# Altium PCB FEE_PCB.PcbDoc (part 2 of 2)
Units mm, origin at the board's own origin, x right, y up, seen from the top; angles counter-clockwise.
Board outline 152.4 x 101.6 mm, 2 copper layers (Top Layer, Bottom Layer); 166 components, 108 nets, 486 pads, 10 vias.
Unrouted connection lines stored in the file: 130.
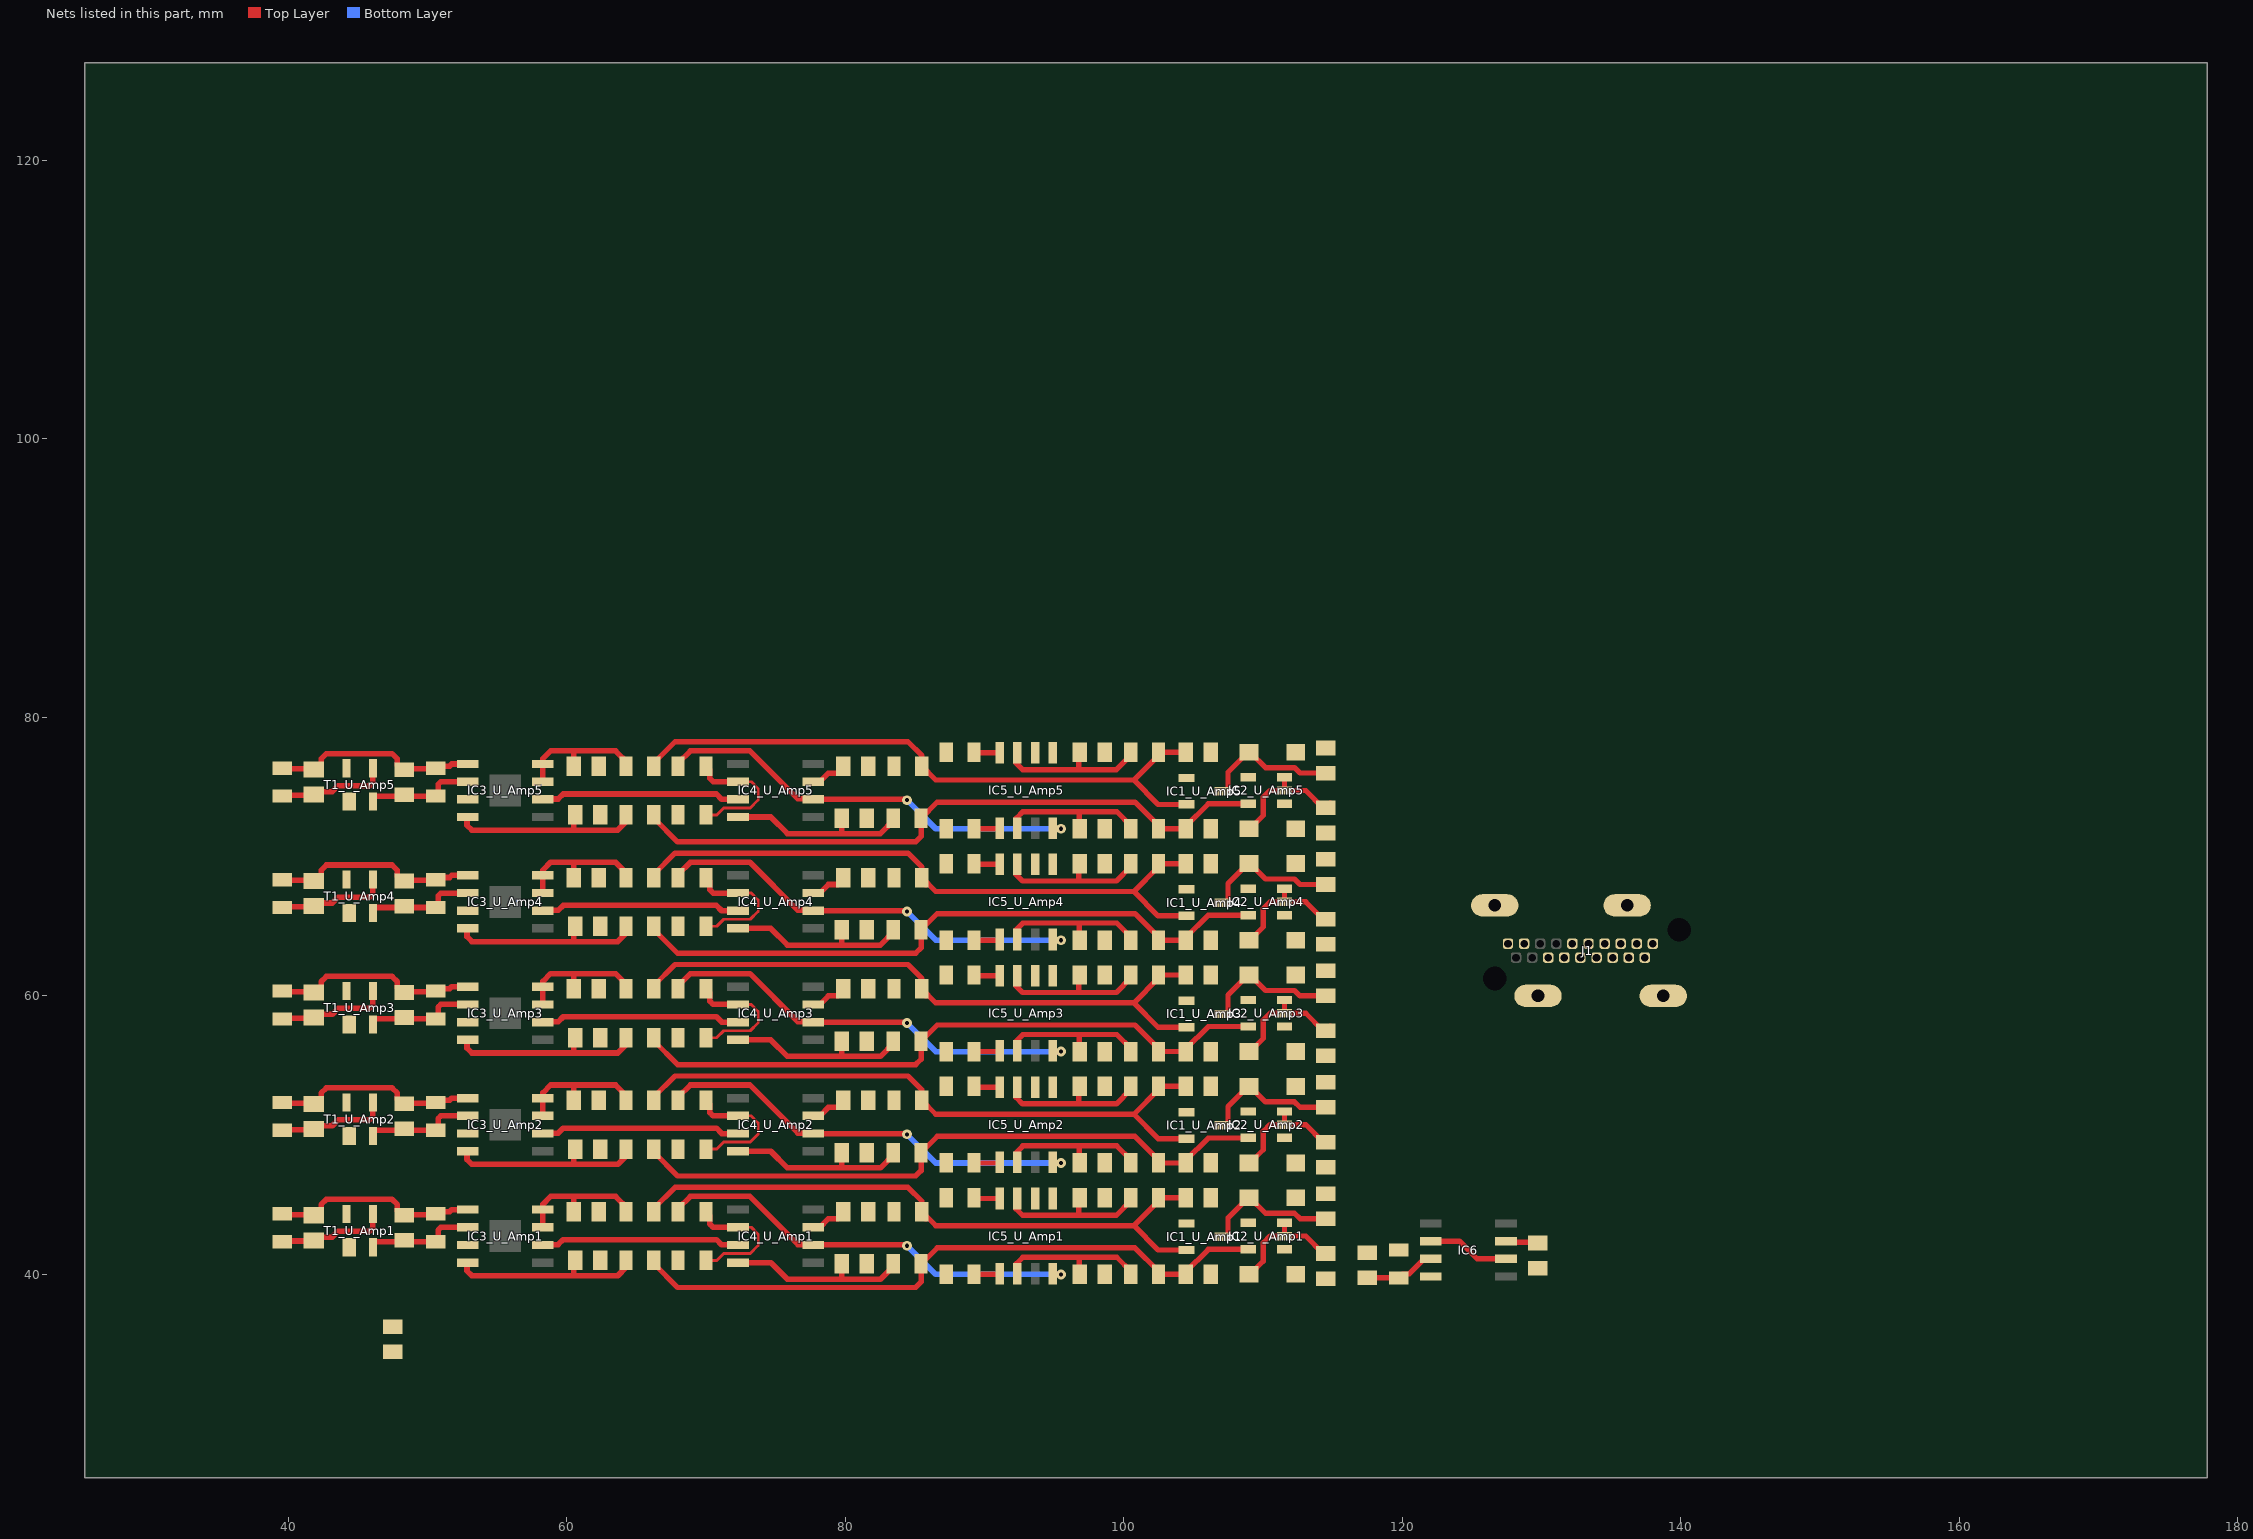
[diagram p2: the nets of this part, all layers, seen from the top]

## Part data
C2_U_Amp1 C2_U_Amp2 C2_U_Amp3 C2_U_Amp4 C2_U_Amp5 C4_U_Amp1 C4_U_Amp2 C4_U_Amp3 C4_U_Amp4 C4_U_Amp5 C8_U_Amp1 C8_U_Amp2 C8_U_Amp3 C8_U_Amp4 C8_U_Amp5 C10_U_Amp1 C10_U_Amp2 C10_U_Amp3 C10_U_Amp4 C10_U_Amp5 C11_U_Amp1 C11_U_Amp2 C11_U_Amp3 C11_U_Amp4 C11_U_Amp5 C12_U_Amp1 C12_U_Amp2 C12_U_Amp3 C12_U_Amp4 C12_U_Amp5 C13_U_Amp1 C13_U_Amp2 C13_U_Amp3 C13_U_Amp4 C13_U_Amp5 C14_U_Amp1 C14_U_Amp2 C14_U_Amp3 C14_U_Amp4 C14_U_Amp5 C15_U_Amp1 C15_U_Amp2 C15_U_Amp3 C15_U_Amp4 C15_U_Amp5 C16_U_Amp1 C16_U_Amp2 C16_U_Amp3 C16_U_Amp4 C16_U_Amp5 C17 C18 C19: library part CC0805_100NF_50V_10%_X7R, "Non-polarised capacitor", Case=0805, Manufacturer=GENERIC, Manufacturer1 ComponentHeight=1mm, Manufacturer1 Example=TDK, Manufacturer1 Part Number=C2012X7R1H104K085AA, Tolerance=±10%, Voltage=50V, Author="CERN DEM JLC", Component Type=Standard, CreateDate=03.12.2007, HelpURL=\\cern.ch\dfs\Applications\Altium\Datasheets\CC0805_X7R_TDK_C.pdf, LatestRevisionDate=22.04.2015, Manufacturer Part Number=CC0805_100NF_50V_10%_X7R, Mounted=Yes, Part Description="SMD Multilayer Chip Ceramic Capacitor", Part Number=CC0805_100NF_50V_10%_X7R, Pin Count=2, Sense=No, SMD=Yes, Socket=No, Status=Preferred, TC=X7R
C5_U_Amp1 C5_U_Amp2 C5_U_Amp3 C5_U_Amp4 C5_U_Amp5: library part CC0805_100PF_50V_5%_C0G_KEMET_C0805C101J5GACAUTO, "Non-polarised capacitor", Case=0805, Manufacturer=KEMET, Manufacturer Part Number=C0805C101J5GACAUTO, Tolerance=±5%, Voltage=50V, Author="CERN DEM BC", Component Type=Standard, ComponentHeight=0.88mm, CreateDate=26.02.2016, HelpURL=\\cern.ch\dfs\Applications\Altium\Datasheets\CC0805_KEMET_C0805C101J5GACAUTO.pdf, LatestRevisionDate=26.02.2016, Mounted=Yes, Part Description="SMD Multilayer Chip Ceramic Capacitor (Automotive Grade)", Part Number=CC0805_100PF_50V_5%_C0G_KEMET_C0805C101J5GACAUTO, Pin Count=2, Sense=No, SMD=Yes, Socket=No, Status="Not Recommended", TC=C0G/NP0
C6_U_Amp1 C6_U_Amp2 C6_U_Amp3 C6_U_Amp4 C6_U_Amp5: library part CC0805_10PF_50V_1%_NP0, "Non-polarised capacitor", Case=0805, Manufacturer=GENERIC, Manufacturer1 ComponentHeight=1.35mm, Manufacturer1 Example=PHYCOMP, Manufacturer1 Part Number=223886118109, Tolerance=±1%, Voltage=50V, Author="CERN DEM MR", Component Type=Standard, CreateDate=31.05.2016, HelpURL=\\cern.ch\dfs\Applications\Altium\Datasheets\CC0805_NP0_PHYCOMP.pdf, LatestRevisionDate=31.05.2016, Manufacturer Part Number=CC0805_10PF_50V_1%_NP0, Mounted=Yes, Part Description="SMD Multilayer Chip Ceramic Capacitor", Part Number=CC0805_10PF_50V_1%_NP0, Pin Count=2, Sense=No, SMD=Yes, Socket=No, Status=None, TC=C0G/NP0
IC1_U_Amp1 IC1_U_Amp2 IC1_U_Amp3 IC1_U_Amp4 IC1_U_Amp5: "3-Terminal Regulator 1=GND 2=OUT 3=IN", Case=SOT23-3, Manufacturer="MICROCHIP TECHNOLOGY", Author="CERN DEM JLC", Bonding=No, Component Type=Standard, ComponentHeight=1.45mm, CreateDate=16.02.2017, Device=MCP1702T-5002E/CB, HelpURL=\\cern.ch\dfs\Applications\Altium\Datasheets\MCP1702T-5002E-CB.pdf, LatestRevisionDate=16.02.2017, Manufacturer Part Number=MCP1702T-5002E/CB, Mounted=Yes, PackageDescription="SOT, 0.95mm Pitch; 3 Pin, 1.50mm W X 2.90mm L X 1.45mm H Body, IPC Medium Density", Part Description="5V 250mA Low Quiescent Current LDO Positive Voltage Regulator", Part Number=MCP1702T-5002E/CB, Pin Count=3, PressFit=No, Sense=No, SMD=Yes, Socket=No
IC2_U_Amp1 IC2_U_Amp2 IC2_U_Amp3 IC2_U_Amp4 IC2_U_Amp5: "200mA, Negative-Output, Low-Dropout Linear Regulator", Case=SOT23-5, Manufacturer=MAXIM, Author="CERN DEM JLC", Bonding=No, Component Type=Standard, ComponentHeight=1.45mm, CreateDate=17.02.2010, Device=MAX1735EUK50+T, HelpURL=\\cern.ch\dfs\Applications\Altium\Datasheets\MAX1735EUK50+T.pdf, LatestRevisionDate=17.02.2010, Manufacturer Part Number=MAX1735EUK50+T, Mounted=Yes, PackageDescription="SOT, 0.95mm pitch; 5 pin, 1.60mm W X 2.90mm L X 1.45mm H body, IPC Medium Density", Part Description="5V, 200mA, Negative-Output, Low-Dropout Linear Regulator", Part Number=MAX1735EUK50+T, Pin Count=5, PressFit=No, Sense=No, SMD=Yes, Socket=No
IC3_U_Amp1 IC3_U_Amp2 IC3_U_Amp3 IC3_U_Amp4 IC3_U_Amp5: library part ADA4817-1, Manufacturer=AD, Name=ADA4817-1
IC4_U_Amp1 IC4_U_Amp2 IC4_U_Amp3 IC4_U_Amp4 IC4_U_Amp5: library part AD8055ANZ, Case=DIP8-300, Manufacturer="ANALOG DEVICES", Author="CERN DEM JLC", Bonding=No, Component Type=Standard, ComponentHeight=5.33mm, CreateDate=14.03.2011, Device=AD8055ANZ, HelpURL=\\cern.ch\dfs\Applications\Altium\Datasheets\AD8055ANZ.pdf, LatestRevisionDate=14.03.2011, Manufacturer Part Number=AD8055ANZ, Mounted=Yes, PackageDescription="DIP 8 Leads, Row Spacing 7.62 mm; Pitch 2.54 mm", Part Description="Low Cost, 300 MHz Voltage Feedback Amplifier", Part Number=AD8055ANZ, Pin Count=7, PressFit=No, Sense=No, SMD=No, Socket=Yes
IC5_U_Amp1 IC5_U_Amp2 IC5_U_Amp3 IC5_U_Amp4 IC5_U_Amp5: "Differential Amplifier", Case=SOIC8, Manufacturer="ANALOG DEVICES", Author="CERN DEM JMW", Bonding=No, Component Type=Standard, ComponentHeight=1.75mm, CreateDate=23.09.2008, Device=AD8131AR, HelpURL=\\cern.ch\dfs\Applications\Altium\Datasheets\AD8131AR.pdf, LatestRevisionDate=13.04.2010, Manufacturer Part Number=AD8131AR, Mounted=Yes, PackageDescription="SOIC 8, Pitch 1.27mm - Body 4x5mm, IPC Medium Density", Part Description="Lost Cost, High Speed Differential Driver", Part Number=AD8131AR, Pin Count=7, PressFit=No, Sense=No, SMD=Yes, Socket=No, Status="Not recommended"
IC6: "Operational Amplifier", Case=SOIC8, Manufacturer="ANALOG DEVICES", Author="CERN DEM JLC", Bonding=No, Component Type=Standard, ComponentHeight=1.75mm, CreateDate=12.06.2013, Device=AD8531ARZ, HelpURL=\\cern.ch\dfs\Applications\Altium\Datasheets\AD8531ARZ.pdf, LatestRevisionDate=12.06.2013, Manufacturer Part Number=AD8531ARZ, Mounted=Yes, PackageDescription="SOIC 8, Pitch 1.27mm - Body 4x5mm, IPC Medium Density", Part Description="Low Cost, 250 mA Output, Single-Supply Amplifier", Part Number=AD8531ARZ, Pin Count=8, PressFit=No, Sense=No, SMD=Yes, Socket=No
J1: library part TYCO_2007435-1, "Connector HDMI 19 Male + 1 Shield", Manufacturer="TYCO ELECTRONICS", Manufacturer Part Number=2007435-1, Author="CERN DEM MR", Component Type=Standard, ComponentHeight=16.4mm, CreateDate=05.07.2016, Family=HDMI, HelpURL=\\cern.ch\dfs\Applications\Altium\Datasheets\TYCO_2007435-1.pdf, LatestRevisionDate=05.07.2016, Mounted=Yes, Part Description="0.578mm Pitch, Through-Hole Right Angle 19 Contacts Flag-HDMI Type-A Receptacle Thru Hole Mounting Pads", Part Number=TYCO_2007435-1, Pin Count=23, PressFit=No, Sense=No, SMD=No, Socket=No, Status=None
L1_U_Amp1 L1_U_Amp2 L1_U_Amp3 L1_U_Amp4 L1_U_Amp5 L2_U_Amp1 L2_U_Amp2 L2_U_Amp3 L2_U_Amp4 L2_U_Amp5: library part IND1206_MURATA_BLM31PG500SN1, "Inductor", Case=1206, Manufacturer=MURATA, Manufacturer Part Number=BLM31PG500SN1, Power=3.5A, Resistance=0.015R, Author="CERN DEM JLC", Component Type=Standard, ComponentHeight=1.3mm, CreateDate=05.12.2013, HelpURL=\\cern.ch\dfs\Applications\Altium\Datasheets\IND1206_MURATA_BLM31P.pdf, LatestRevisionDate=05.12.2013, Mounted=Yes, Part Description="SMD EMIFIL Chip Ferrite Bead", Part Number=IND1206_MURATA_BLM31PG500SN1, Pin Count=2, Sense=No, SMD=Yes, Socket=No, Status=None
R1_U_Amp1 R1_U_Amp2 R1_U_Amp3 R1_U_Amp4 R1_U_Amp5 R4_U_Amp1 R4_U_Amp2 R4_U_Amp3 R4_U_Amp4 R4_U_Amp5: library part R0805_5K1_1%_0.125W_100PPM, "Resistor - 1%", Case=0805, Manufacturer=GENERIC, Manufacturer1 ComponentHeight=0.6mm, Manufacturer1 Example="NIC COMPONENT", Manufacturer1 Part Number=NRC10F5101TRF, Power=0.125W, Tolerance=±1%, Author="CERN DEM JLC", Component Type=Standard, CreateDate=03.12.2007, HelpURL=\\cern.ch\dfs\Applications\Altium\Datasheets\R0805_NIC_NRC.pdf, LatestRevisionDate=13.03.2008, Manufacturer Part Number=R0805_5K1_1%_0.125W_100PPM, Mounted=Yes, Part Description="General Purpose Thick Film Chip Resistor", Part Number=R0805_5K1_1%_0.125W_100PPM, Pin Count=2, PressFit=No, Sense=No, SMD=Yes, Socket=No, Status=Preferred, TC=±100ppm/°C
R2_U_Amp1 R2_U_Amp2 R2_U_Amp3 R2_U_Amp4 R2_U_Amp5 R3_U_Amp1 R3_U_Amp2 R3_U_Amp3 R3_U_Amp4 R3_U_Amp5 R5_U_Amp1 R5_U_Amp2 R5_U_Amp3 R5_U_Amp4 R5_U_Amp5 R7_U_Amp1 R7_U_Amp2 R7_U_Amp3 R7_U_Amp4 R7_U_Amp5 R8_U_Amp1 R8_U_Amp2 R8_U_Amp3 R8_U_Amp4 R8_U_Amp5 R9_U_Amp1 R9_U_Amp2 R9_U_Amp3 R9_U_Amp4 R9_U_Amp5: library part R0805_3R_1%_0.125W_200PPM, "Resistor - 1%", Case=0805, Manufacturer=GENERIC, Manufacturer1 ComponentHeight=0.65mm, Manufacturer1 Example="YAGEO PHYCOMP", Manufacturer1 Part Number="232273463008L or RC0805FR-073RL", Power=0.125W, Tolerance=±1%, Author="CERN DEM JLC", Component Type=Standard, CreateDate=03.12.2007, HelpURL=\\cern.ch\dfs\Applications\Altium\Datasheets\R0805_Phycomp_RC0805.pdf, LatestRevisionDate=17.10.2012, Manufacturer Part Number=R0805_3R_1%_0.125W_200PPM, Mounted=Yes, Part Description="General Purpose Thick Film Chip Resistor", Part Number=R0805_3R_1%_0.125W_200PPM, Pin Count=2, PressFit=No, Sense=No, SMD=Yes, Socket=No, Status=Preferred, TC=±200ppm/°C
R6_U_Amp1 R6_U_Amp2 R6_U_Amp3 R6_U_Amp4 R6_U_Amp5: library part R0805_43K_1%_0.125W_100PPM, "Resistor - 1%", Case=0805, Manufacturer=GENERIC, Manufacturer1 ComponentHeight=0.6mm, Manufacturer1 Example="NIC COMPONENT", Manufacturer1 Part Number=NRC10F4302TRF, Power=0.125W, Tolerance=±1%, Author="CERN DEM JLC", Component Type=Standard, CreateDate=03.12.2007, HelpURL=\\cern.ch\dfs\Applications\Altium\Datasheets\R0805_NIC_NRC.pdf, LatestRevisionDate=13.03.2008, Manufacturer Part Number=R0805_43K_1%_0.125W_100PPM, Mounted=Yes, Part Description="General Purpose Thick Film Chip Resistor", Part Number=R0805_43K_1%_0.125W_100PPM, Pin Count=2, PressFit=No, Sense=No, SMD=Yes, Socket=No, Status=Preferred, TC=±100ppm/°C
R10_U_Amp1 R10_U_Amp2 R10_U_Amp3 R10_U_Amp4 R10_U_Amp5 R11_U_Amp1 R11_U_Amp2 R11_U_Amp3 R11_U_Amp4 R11_U_Amp5: library part R0805_51R_1%_0.125W_100PPM, "Resistor - 1%", Case=0805, Manufacturer=GENERIC, Manufacturer1 ComponentHeight=0.6mm, Manufacturer1 Example="NIC COMPONENT", Manufacturer1 Part Number=NRC10F51R0TRF, Power=0.125W, Tolerance=±1%, Author="CERN DEM JLC", Component Type=Standard, CreateDate=03.12.2007, HelpURL=\\cern.ch\dfs\Applications\Altium\Datasheets\R0805_NIC_NRC.pdf, LatestRevisionDate=13.03.2008, Manufacturer Part Number=R0805_51R_1%_0.125W_100PPM, Mounted=Yes, Part Description="General Purpose Thick Film Chip Resistor", Part Number=R0805_51R_1%_0.125W_100PPM, Pin Count=2, PressFit=No, Sense=No, SMD=Yes, Socket=No, Status=Preferred, TC=±100ppm/°C
R12: library part R0805_1K_1%_0.125W_100PPM, "Resistor - 1%", Case=0805, Manufacturer=GENERIC, Manufacturer1 ComponentHeight=0.6mm, Manufacturer1 Example="NIC COMPONENT", Manufacturer1 Part Number=NRC10F1001TRF, Power=0.125W, Tolerance=±1%, Author="CERN DEM JLC", Component Type=Standard, CreateDate=03.12.2007, HelpURL=\\cern.ch\dfs\Applications\Altium\Datasheets\R0805_NIC_NRC.pdf, LatestRevisionDate=13.03.2008, Manufacturer Part Number=R0805_1K_1%_0.125W_100PPM, Mounted=Yes, Part Description="General Purpose Thick Film Chip Resistor", Part Number=R0805_1K_1%_0.125W_100PPM, Pin Count=2, PressFit=No, Sense=No, SMD=Yes, Socket=No, Status=Preferred, TC=±100ppm/°C
R13_U_Amp1 R13_U_Amp2 R13_U_Amp3 R13_U_Amp4 R13_U_Amp5: library part R0805_510R_1%_0.125W_100PPM, "Resistor - 1%", Case=0805, Manufacturer=GENERIC, Manufacturer1 ComponentHeight=0.6mm, Manufacturer1 Example="NIC COMPONENT", Manufacturer1 Part Number=NRC10F5100TRF, Power=0.125W, Tolerance=±1%, Author="CERN DEM JLC", Component Type=Standard, CreateDate=03.12.2007, HelpURL=\\cern.ch\dfs\Applications\Altium\Datasheets\R0805_NIC_NRC.pdf, LatestRevisionDate=13.03.2008, Manufacturer Part Number=R0805_510R_1%_0.125W_100PPM, Mounted=Yes, Part Description="General Purpose Thick Film Chip Resistor", Part Number=R0805_510R_1%_0.125W_100PPM, Pin Count=2, PressFit=No, Sense=No, SMD=Yes, Socket=No, Status=Preferred, TC=±100ppm/°C
T1_U_Amp1 T1_U_Amp2 T1_U_Amp3 T1_U_Amp4 T1_U_Amp5: "N-CHANNEL DMOS FET WITH ZENER DIODE", Case=SOT143N, Manufacturer=CALOGIC, Author="CERN DEM MR", Bonding=No, Component Type=Standard, ComponentHeight=1.3mm, CreateDate=19.05.2016, Device=SST213, HelpURL=\\cern.ch\dfs\Applications\Altium\Datasheets\SST213.pdf, LatestRevisionDate=19.05.2016, Manufacturer Part Number=SST213, Mounted=Yes, PackageDescription="SOT143, 4-Leads, Body 3.0x2.6mm (max), Pitch 1.92mm, IPC Medium Density", Part Description="Fast DMOS FET Switches N-Channel Enhancement-Mode", Part Number=SST213, Pin Count=4, PressFit=No, Sense=No, SMD=Yes, Socket=No

## Via types
v1: diameter 0.7, hole 0.3, Top Layer to Bottom Layer, 10 vias

## Nets (pads, with @x,y where several pads share a name; then routed paths per layer and width w, separated by ;. In a path a pad name is that pad's centre, name@x,y a point inside that pad or via, vN(x,y) a via of type N, cw(c..) or ccw(c..) an arc to the next point about the centre after c; other vN are vias at no path point)
CHASSIS: J1.2 J1.5 J1.8 J1.11 J1.17 J1.SHIELD
DET_IN0: C6_U_Amp5.1 IC3_U_Amp5.2 R1_U_Amp5.1 T1_U_Amp5.2 | length 8
  Top Layer w0.4: T1_U_Amp5.2@46.085,73.947 46.085,74.247 46.185,74.347 48.335,74.347 50.731,74.347 50.768,74.385 50.768,75.188 50.965,75.385 IC3_U_Amp5.2@52.888,75.385
DET_IN1: C6_U_Amp4.1 IC3_U_Amp4.2 R1_U_Amp4.1 T1_U_Amp4.2 | length 8
  Top Layer w0.4: T1_U_Amp4.2@46.085,65.947 46.085,66.247 46.185,66.347 48.335,66.347 50.731,66.347 50.768,66.385 50.768,67.188 50.965,67.385 IC3_U_Amp4.2@52.888,67.385
DET_IN2: C6_U_Amp3.1 IC3_U_Amp3.2 R1_U_Amp3.1 T1_U_Amp3.2 | length 8
  Top Layer w0.4: T1_U_Amp3.2@46.085,57.947 46.085,58.247 46.185,58.347 48.335,58.347 50.731,58.347 50.768,58.385 50.768,59.188 50.965,59.385 IC3_U_Amp3.2@52.888,59.385
DET_IN3: C6_U_Amp2.1 IC3_U_Amp2.2 R1_U_Amp2.1 T1_U_Amp2.2 | length 8
  Top Layer w0.4: T1_U_Amp2.2@46.085,49.947 46.085,50.247 46.185,50.347 48.335,50.347 50.731,50.347 50.768,50.385 50.768,51.188 50.965,51.385 IC3_U_Amp2.2@52.888,51.385
DET_IN4: C6_U_Amp1.1 IC3_U_Amp1.2 R1_U_Amp1.1 T1_U_Amp1.2 | length 8
  Top Layer w0.4: T1_U_Amp1.2@46.085,41.947 46.085,42.247 46.185,42.347 48.335,42.347 50.731,42.347 50.768,42.385 50.768,43.188 50.965,43.385 IC3_U_Amp1.2@52.888,43.385
GND: C2_U_Amp1.2 C2_U_Amp2.2 C2_U_Amp3.2 C2_U_Amp4.2 C2_U_Amp5.2 C4_U_Amp1.2 C4_U_Amp2.2 C4_U_Amp3.2 C4_U_Amp4.2 C4_U_Amp5.2 C8_U_Amp1.2 C8_U_Amp2.2 C8_U_Amp3.2 C8_U_Amp4.2 C8_U_Amp5.2 C10_U_Amp1.2 C10_U_Amp2.2 C10_U_Amp3.2 C10_U_Amp4.2 C10_U_Amp5.2 C11_U_Amp1.2 C11_U_Amp2.2 C11_U_Amp3.2 C11_U_Amp4.2 C11_U_Amp5.2 C12_U_Amp1.2 C12_U_Amp2.2 C12_U_Amp3.2 C12_U_Amp4.2 C12_U_Amp5.2 C13_U_Amp1.2 C13_U_Amp2.2 C13_U_Amp3.2 C13_U_Amp4.2 C13_U_Amp5.2 C14_U_Amp1.2 C14_U_Amp2.2 C14_U_Amp3.2 C14_U_Amp4.2 C14_U_Amp5.2 C15_U_Amp1.2 C15_U_Amp2.2 C15_U_Amp3.2 C15_U_Amp4.2 C15_U_Amp5.2 C16_U_Amp1.2 C16_U_Amp2.2 C16_U_Amp3.2 C16_U_Amp4.2 C16_U_Amp5.2 C17.1 C18.2 C19.1 IC1_U_Amp1.1 IC1_U_Amp2.1 IC1_U_Amp3.1 IC1_U_Amp4.1 IC1_U_Amp5.1 IC2_U_Amp1.1 IC2_U_Amp1.4 IC2_U_Amp2.1 IC2_U_Amp2.4 IC2_U_Amp3.1 IC2_U_Amp3.4 IC2_U_Amp4.1 IC2_U_Amp4.4 IC2_U_Amp5.1 IC2_U_Amp5.4 IC3_U_Amp1.3 IC3_U_Amp2.3 IC3_U_Amp3.3 IC3_U_Amp4.3 IC3_U_Amp5.3 IC5_U_Amp1.2 IC5_U_Amp2.2 IC5_U_Amp3.2 IC5_U_Amp4.2 IC5_U_Amp5.2 IC6.4 R4_U_Amp1.1 R4_U_Amp2.1 R4_U_Amp3.1 R4_U_Amp4.1 R4_U_Amp5.1 T1_U_Amp1.1 T1_U_Amp2.1 T1_U_Amp3.1 T1_U_Amp4.1 T1_U_Amp5.1
NetC2_U_Amp1_1: C2_U_Amp1.1 IC1_U_Amp1.3 L1_U_Amp1.2 | length 9.9
  Top Layer w0.381: IC1_U_Amp1.3@107.1,42.7 107.375,42.7 107.484,42.81 107.484,44.059 108.925,45.5 L1_U_Amp1.2@109,45.5 109.075,45.5 110.184,44.391 112.262,44.391 112.652,44 C2_U_Amp1.1@114.5,44
NetC2_U_Amp2_1: C2_U_Amp2.1 IC1_U_Amp2.3 L1_U_Amp2.2 | length 9.9
  Top Layer w0.381: IC1_U_Amp2.3@107.1,50.7 107.375,50.7 107.484,50.809 107.484,52.059 108.925,53.5 L1_U_Amp2.2@109,53.5 109.075,53.5 110.184,52.39 112.262,52.39 112.652,52 C2_U_Amp2.1@114.5,52
NetC2_U_Amp3_1: C2_U_Amp3.1 IC1_U_Amp3.3 L1_U_Amp3.2 | length 9.9
  Top Layer w0.381: IC1_U_Amp3.3@107.1,58.7 107.375,58.7 107.484,58.809 107.484,60.059 108.925,61.5 L1_U_Amp3.2@109,61.5 109.075,61.5 110.184,60.39 112.262,60.39 112.652,60 C2_U_Amp3.1@114.5,60
NetC2_U_Amp4_1: C2_U_Amp4.1 IC1_U_Amp4.3 L1_U_Amp4.2 | length 9.9
  Top Layer w0.381: IC1_U_Amp4.3@107.1,66.7 107.375,66.7 107.484,66.809 107.484,68.059 108.925,69.5 L1_U_Amp4.2@109,69.5 109.075,69.5 110.184,68.39 112.262,68.39 112.652,68 C2_U_Amp4.1@114.5,68
NetC2_U_Amp5_1: C2_U_Amp5.1 IC1_U_Amp5.3 L1_U_Amp5.2 | length 9.9
  Top Layer w0.381: IC1_U_Amp5.3@107.1,74.7 107.375,74.7 107.484,74.809 107.484,76.059 108.925,77.5 L1_U_Amp5.2@109,77.5 109.075,77.5 110.184,76.391 112.262,76.391 112.652,76 C2_U_Amp5.1@114.5,76
NetC4_U_Amp1_1: C4_U_Amp1.1 IC2_U_Amp1.2 IC2_U_Amp1.3 L2_U_Amp1.2 | length 9.4
  Top Layer w0.381: L2_U_Amp1.2@108.925,40 L2_U_Amp1.2@109,40 109.075,40 110.023,40.948 110.023,42.273 110.5,42.75 IC2_U_Amp1.2@111.55,42.75 ; IC2_U_Amp1.3@111.55,43.7 IC2_U_Amp1.2@111.55,42.75 ; C4_U_Amp1.1@114.834,41.835 C4_U_Amp1.1@114.5,41.5 114.325,41.5 113.075,42.75 IC2_U_Amp1.2@111.55,42.75
NetC4_U_Amp2_1: C4_U_Amp2.1 IC2_U_Amp2.2 IC2_U_Amp2.3 L2_U_Amp2.2 | length 9.4
  Top Layer w0.381: L2_U_Amp2.2@108.925,48 L2_U_Amp2.2@109,48 109.075,48 110.023,48.948 110.023,50.273 110.5,50.75 IC2_U_Amp2.2@111.55,50.75 ; IC2_U_Amp2.3@111.55,51.7 IC2_U_Amp2.2@111.55,50.75 ; C4_U_Amp2.1@114.834,49.835 C4_U_Amp2.1@114.5,49.5 114.325,49.5 113.075,50.75 IC2_U_Amp2.2@111.55,50.75
NetC4_U_Amp3_1: C4_U_Amp3.1 IC2_U_Amp3.2 IC2_U_Amp3.3 L2_U_Amp3.2 | length 9.4
  Top Layer w0.381: L2_U_Amp3.2@108.925,56 L2_U_Amp3.2@109,56 109.075,56 110.023,56.948 110.023,58.273 110.5,58.75 IC2_U_Amp3.2@111.55,58.75 ; IC2_U_Amp3.3@111.55,59.7 IC2_U_Amp3.2@111.55,58.75 ; C4_U_Amp3.1@114.834,57.834 C4_U_Amp3.1@114.5,57.5 114.325,57.5 113.075,58.75 IC2_U_Amp3.2@111.55,58.75
NetC4_U_Amp4_1: C4_U_Amp4.1 IC2_U_Amp4.2 IC2_U_Amp4.3 L2_U_Amp4.2 | length 9.4
  Top Layer w0.381: L2_U_Amp4.2@108.925,64 L2_U_Amp4.2@109,64 109.075,64 110.023,64.948 110.023,66.273 110.5,66.75 IC2_U_Amp4.2@111.55,66.75 ; IC2_U_Amp4.3@111.55,67.7 IC2_U_Amp4.2@111.55,66.75 ; C4_U_Amp4.1@114.834,65.834 C4_U_Amp4.1@114.5,65.5 114.325,65.5 113.075,66.75 IC2_U_Amp4.2@111.55,66.75
NetC4_U_Amp5_1: C4_U_Amp5.1 IC2_U_Amp5.2 IC2_U_Amp5.3 L2_U_Amp5.2 | length 9.4
  Top Layer w0.381: L2_U_Amp5.2@108.925,72 L2_U_Amp5.2@109,72 109.075,72 110.023,72.948 110.023,74.273 110.5,74.75 IC2_U_Amp5.2@111.55,74.75 ; IC2_U_Amp5.3@111.55,75.7 IC2_U_Amp5.2@111.55,74.75 ; C4_U_Amp5.1@114.834,73.835 C4_U_Amp5.1@114.5,73.5 114.325,73.5 113.075,74.75 IC2_U_Amp5.2@111.55,74.75
NetC5_U_Amp1_1: C5_U_Amp1.1 C6_U_Amp1.2 IC3_U_Amp1.1 R1_U_Amp1.2 R13_U_Amp1.1 | length 15
  Top Layer w0.4: R13_U_Amp1.1@39.585,44.347 39.635,44.297 41.785,44.297 C5_U_Amp1.1@41.835,44.247 41.985,44.247 42.36,44.622 42.36,45.016 42.742,45.397 47.454,45.397 47.835,45.016 47.835,44.572 48.16,44.247 C6_U_Amp1.2@48.335,44.247 48.385,44.297 50.535,44.297 R1_U_Amp1.2@50.585,44.347 50.738,44.5 51.588,44.5 51.743,44.655 IC3_U_Amp1.1@52.888,44.655 IC3_U_Amp1.1@52.885,44.652
NetC5_U_Amp1_2: C5_U_Amp1.2 R13_U_Amp1.2 T1_U_Amp1.3 | length 7.9
  Top Layer w0.4: R13_U_Amp1.2@39.585,42.347 39.635,42.397 41.785,42.397 C5_U_Amp1.2@41.835,42.447 42.06,42.672 43.16,42.672 43.585,43.097 45.851,43.097 46.085,43.332 T1_U_Amp1.3@46.085,44.347
NetC5_U_Amp2_1: C5_U_Amp2.1 C6_U_Amp2.2 IC3_U_Amp2.1 R1_U_Amp2.2 R13_U_Amp2.1 | length 15
  Top Layer w0.4: R13_U_Amp2.1@39.585,52.347 39.635,52.297 41.785,52.297 C5_U_Amp2.1@41.835,52.247 41.985,52.247 42.36,52.622 42.36,53.016 42.742,53.397 47.454,53.397 47.835,53.016 47.835,52.572 48.16,52.247 C6_U_Amp2.2@48.335,52.247 48.385,52.297 50.535,52.297 R1_U_Amp2.2@50.585,52.347 50.738,52.5 51.588,52.5 51.743,52.655 IC3_U_Amp2.1@52.888,52.655 IC3_U_Amp2.1@52.885,52.652
NetC5_U_Amp2_2: C5_U_Amp2.2 R13_U_Amp2.2 T1_U_Amp2.3 | length 7.9
  Top Layer w0.4: R13_U_Amp2.2@39.585,50.347 39.635,50.397 41.785,50.397 C5_U_Amp2.2@41.835,50.447 42.06,50.672 43.16,50.672 43.585,51.097 45.851,51.097 46.085,51.332 T1_U_Amp2.3@46.085,52.347
NetC5_U_Amp3_1: C5_U_Amp3.1 C6_U_Amp3.2 IC3_U_Amp3.1 R1_U_Amp3.2 R13_U_Amp3.1 | length 15
  Top Layer w0.4: R13_U_Amp3.1@39.585,60.347 39.635,60.297 41.785,60.297 C5_U_Amp3.1@41.835,60.247 41.985,60.247 42.36,60.622 42.36,61.016 42.742,61.397 47.454,61.397 47.835,61.016 47.835,60.572 48.16,60.247 C6_U_Amp3.2@48.335,60.247 48.385,60.297 50.535,60.297 R1_U_Amp3.2@50.585,60.347 50.738,60.5 51.588,60.5 51.743,60.655 IC3_U_Amp3.1@52.888,60.655 IC3_U_Amp3.1@52.885,60.652
NetC5_U_Amp3_2: C5_U_Amp3.2 R13_U_Amp3.2 T1_U_Amp3.3 | length 7.9
  Top Layer w0.4: R13_U_Amp3.2@39.585,58.347 39.635,58.397 41.785,58.397 C5_U_Amp3.2@41.835,58.447 42.06,58.672 43.16,58.672 43.585,59.097 45.851,59.097 46.085,59.332 T1_U_Amp3.3@46.085,60.347
NetC5_U_Amp4_1: C5_U_Amp4.1 C6_U_Amp4.2 IC3_U_Amp4.1 R1_U_Amp4.2 R13_U_Amp4.1 | length 15
  Top Layer w0.4: R13_U_Amp4.1@39.585,68.347 39.635,68.297 41.785,68.297 C5_U_Amp4.1@41.835,68.247 41.985,68.247 42.36,68.622 42.36,69.016 42.742,69.397 47.454,69.397 47.835,69.016 47.835,68.572 48.16,68.247 C6_U_Amp4.2@48.335,68.247 48.385,68.297 50.535,68.297 R1_U_Amp4.2@50.585,68.347 50.738,68.5 51.588,68.5 51.743,68.655 IC3_U_Amp4.1@52.888,68.655 IC3_U_Amp4.1@52.885,68.652
NetC5_U_Amp4_2: C5_U_Amp4.2 R13_U_Amp4.2 T1_U_Amp4.3 | length 7.9
  Top Layer w0.4: R13_U_Amp4.2@39.585,66.347 39.635,66.397 41.785,66.397 C5_U_Amp4.2@41.835,66.447 42.06,66.672 43.16,66.672 43.585,67.097 45.851,67.097 46.085,67.332 T1_U_Amp4.3@46.085,68.347
NetC5_U_Amp5_1: C5_U_Amp5.1 C6_U_Amp5.2 IC3_U_Amp5.1 R1_U_Amp5.2 R13_U_Amp5.1 | length 15
  Top Layer w0.4: R13_U_Amp5.1@39.585,76.347 39.635,76.297 41.785,76.297 C5_U_Amp5.1@41.835,76.247 41.985,76.247 42.36,76.622 42.36,77.016 42.742,77.397 47.454,77.397 47.835,77.016 47.835,76.572 48.16,76.247 C6_U_Amp5.2@48.335,76.247 48.385,76.297 50.535,76.297 R1_U_Amp5.2@50.585,76.347 50.738,76.5 51.588,76.5 51.743,76.655 IC3_U_Amp5.1@52.888,76.655 IC3_U_Amp5.1@52.885,76.652
NetC5_U_Amp5_2: C5_U_Amp5.2 R13_U_Amp5.2 T1_U_Amp5.3 | length 7.9
  Top Layer w0.4: R13_U_Amp5.2@39.585,74.347 39.635,74.397 41.785,74.397 C5_U_Amp5.2@41.835,74.447 42.06,74.672 43.16,74.672 43.585,75.097 45.851,75.097 46.085,75.332 T1_U_Amp5.3@46.085,76.347
NetC8_U_Amp1_1: C8_U_Amp1.1 IC1_U_Amp1.2 R2_U_Amp1.1 R5_U_Amp1.1 R8_U_Amp1.1 | length 46.9
  Top Layer w0.381: R2_U_Amp1.1@66.25,44.5 66.25,44.725 67.775,46.25 84.5,46.25 85.5,45.25 R5_U_Amp1.1@85.5,44.5 ; R5_U_Amp1.1@85.794,43.99 85.785,43.99 85.5,44.275 R5_U_Amp1.1@85.5,44.5 ; C8_U_Amp1.1@104.45,45.325 C8_U_Amp1.1@104.45,45.5 R8_U_Amp1.1@102.5,45.5 102.5,45.275 100.725,43.5 ; IC1_U_Amp1.2@104.5,41.75 102.475,41.75 100.725,43.5 ; R5_U_Amp1.1@85.5,44.5 86.5,43.5 100.725,43.5
NetC8_U_Amp2_1: C8_U_Amp2.1 IC1_U_Amp2.2 R2_U_Amp2.1 R5_U_Amp2.1 R8_U_Amp2.1 | length 46.9
  Top Layer w0.381: R2_U_Amp2.1@66.25,52.5 66.25,52.725 67.775,54.25 84.5,54.25 85.5,53.25 R5_U_Amp2.1@85.5,52.5 ; R5_U_Amp2.1@85.794,51.99 85.785,51.99 85.5,52.275 R5_U_Amp2.1@85.5,52.5 ; C8_U_Amp2.1@104.45,53.325 C8_U_Amp2.1@104.45,53.5 R8_U_Amp2.1@102.5,53.5 102.5,53.275 100.725,51.5 ; IC1_U_Amp2.2@104.5,49.75 102.475,49.75 100.725,51.5 ; R5_U_Amp2.1@85.5,52.5 86.5,51.5 100.725,51.5
NetC8_U_Amp3_1: C8_U_Amp3.1 IC1_U_Amp3.2 R2_U_Amp3.1 R5_U_Amp3.1 R8_U_Amp3.1 | length 46.9
  Top Layer w0.381: R2_U_Amp3.1@66.25,60.5 66.25,60.725 67.775,62.25 84.5,62.25 85.5,61.25 R5_U_Amp3.1@85.5,60.5 ; R5_U_Amp3.1@85.794,59.99 85.785,59.99 85.5,60.275 R5_U_Amp3.1@85.5,60.5 ; C8_U_Amp3.1@104.45,61.325 C8_U_Amp3.1@104.45,61.5 R8_U_Amp3.1@102.5,61.5 102.5,61.275 100.725,59.5 ; IC1_U_Amp3.2@104.5,57.75 102.475,57.75 100.725,59.5 ; R5_U_Amp3.1@85.5,60.5 86.5,59.5 100.725,59.5
NetC8_U_Amp4_1: C8_U_Amp4.1 IC1_U_Amp4.2 R2_U_Amp4.1 R5_U_Amp4.1 R8_U_Amp4.1 | length 46.9
  Top Layer w0.381: R2_U_Amp4.1@66.25,68.5 66.25,68.725 67.775,70.25 84.5,70.25 85.5,69.25 R5_U_Amp4.1@85.5,68.5 ; R5_U_Amp4.1@85.794,67.99 85.785,67.99 85.5,68.275 R5_U_Amp4.1@85.5,68.5 ; C8_U_Amp4.1@104.45,69.325 C8_U_Amp4.1@104.45,69.5 R8_U_Amp4.1@102.5,69.5 102.5,69.275 100.725,67.5 ; IC1_U_Amp4.2@104.5,65.75 102.475,65.75 100.725,67.5 ; R5_U_Amp4.1@85.5,68.5 86.5,67.5 100.725,67.5
NetC8_U_Amp5_1: C8_U_Amp5.1 IC1_U_Amp5.2 R2_U_Amp5.1 R5_U_Amp5.1 R8_U_Amp5.1 | length 46.9
  Top Layer w0.381: R2_U_Amp5.1@66.25,76.5 66.25,76.725 67.775,78.25 84.5,78.25 85.5,77.25 R5_U_Amp5.1@85.5,76.5 ; R5_U_Amp5.1@85.794,75.99 85.785,75.99 85.5,76.275 R5_U_Amp5.1@85.5,76.5 ; C8_U_Amp5.1@104.45,77.325 C8_U_Amp5.1@104.45,77.5 R8_U_Amp5.1@102.5,77.5 102.5,77.275 100.725,75.5 ; IC1_U_Amp5.2@104.5,73.75 102.475,73.75 100.725,75.5 ; R5_U_Amp5.1@85.5,76.5 86.5,75.5 100.725,75.5
NetC10_U_Amp1_1: C10_U_Amp1.1 IC2_U_Amp1.5 R3_U_Amp1.1 R7_U_Amp1.1 R9_U_Amp1.1 | length 47.6
  Top Layer w0.381: R3_U_Amp1.1@66.25,41 66.25,40.775 67.965,39.06 85.059,39.06 85.45,39.45 R7_U_Amp1.1@85.45,40.75 ; R7_U_Amp1.1@85.45,40.975 R7_U_Amp1.1@85.45,40.75 ; IC2_U_Amp1.5@108.95,41.8 106.075,41.8 104.45,40.175 C10_U_Amp1.1@104.45,40 R9_U_Amp1.1@102.5,40 102.5,40.225 100.816,41.909 86.609,41.909 R7_U_Amp1.1@85.45,40.75
NetC10_U_Amp2_1: C10_U_Amp2.1 IC2_U_Amp2.5 R3_U_Amp2.1 R7_U_Amp2.1 R9_U_Amp2.1 | length 47.6
  Top Layer w0.381: R3_U_Amp2.1@66.25,49 66.25,48.775 67.965,47.059 85.059,47.059 85.45,47.45 R7_U_Amp2.1@85.45,48.75 ; R7_U_Amp2.1@85.45,48.975 R7_U_Amp2.1@85.45,48.75 ; IC2_U_Amp2.5@108.95,49.8 106.075,49.8 104.45,48.175 C10_U_Amp2.1@104.45,48 R9_U_Amp2.1@102.5,48 102.5,48.225 100.816,49.909 86.609,49.909 R7_U_Amp2.1@85.45,48.75
NetC10_U_Amp3_1: C10_U_Amp3.1 IC2_U_Amp3.5 R3_U_Amp3.1 R7_U_Amp3.1 R9_U_Amp3.1 | length 47.6
  Top Layer w0.381: R3_U_Amp3.1@66.25,57 66.25,56.775 67.965,55.059 85.059,55.059 85.45,55.45 R7_U_Amp3.1@85.45,56.75 ; R7_U_Amp3.1@85.45,56.975 R7_U_Amp3.1@85.45,56.75 ; IC2_U_Amp3.5@108.95,57.8 106.075,57.8 104.45,56.175 C10_U_Amp3.1@104.45,56 R9_U_Amp3.1@102.5,56 102.5,56.225 100.816,57.909 86.609,57.909 R7_U_Amp3.1@85.45,56.75
NetC10_U_Amp4_1: C10_U_Amp4.1 IC2_U_Amp4.5 R3_U_Amp4.1 R7_U_Amp4.1 R9_U_Amp4.1 | length 47.6
  Top Layer w0.381: R3_U_Amp4.1@66.25,65 66.25,64.775 67.965,63.059 85.059,63.059 85.45,63.45 R7_U_Amp4.1@85.45,64.75 ; R7_U_Amp4.1@85.45,64.975 R7_U_Amp4.1@85.45,64.75 ; IC2_U_Amp4.5@108.95,65.8 106.075,65.8 104.45,64.175 C10_U_Amp4.1@104.45,64 R9_U_Amp4.1@102.5,64 102.5,64.225 100.816,65.909 86.609,65.909 R7_U_Amp4.1@85.45,64.75
NetC10_U_Amp5_1: C10_U_Amp5.1 IC2_U_Amp5.5 R3_U_Amp5.1 R7_U_Amp5.1 R9_U_Amp5.1 | length 47.6
  Top Layer w0.381: R3_U_Amp5.1@66.25,73 66.25,72.775 67.965,71.059 85.059,71.059 85.45,71.45 R7_U_Amp5.1@85.45,72.75 ; R7_U_Amp5.1@85.45,72.975 R7_U_Amp5.1@85.45,72.75 ; IC2_U_Amp5.5@108.95,73.8 106.075,73.8 104.45,72.175 C10_U_Amp5.1@104.45,72 R9_U_Amp5.1@102.5,72 102.5,72.225 100.816,73.909 86.609,73.909 R7_U_Amp5.1@85.45,72.75
NetC11_U_Amp1_1: C11_U_Amp1.1 IC3_U_Amp1.7 IC3_U_Amp1.8 R2_U_Amp1.2 | length 9.7
  Top Layer w0.4: IC3_U_Amp1.7@58.288,43.385 IC3_U_Amp1.8@58.288,44.655 58.288,45.038 58.85,45.6 60.5,45.6 ; C11_U_Amp1.1@60.5,44.5 60.5,45.6 ; R2_U_Amp1.2@64.438,44.5 64.438,44.675 63.513,45.6 60.5,45.6
NetC11_U_Amp2_1: C11_U_Amp2.1 IC3_U_Amp2.7 IC3_U_Amp2.8 R2_U_Amp2.2 | length 9.7
  Top Layer w0.4: IC3_U_Amp2.7@58.288,51.385 IC3_U_Amp2.8@58.288,52.655 58.288,53.038 58.85,53.6 60.5,53.6 ; C11_U_Amp2.1@60.5,52.5 60.5,53.6 ; R2_U_Amp2.2@64.438,52.5 64.438,52.675 63.513,53.6 60.5,53.6
NetC11_U_Amp3_1: C11_U_Amp3.1 IC3_U_Amp3.7 IC3_U_Amp3.8 R2_U_Amp3.2 | length 9.7
  Top Layer w0.4: IC3_U_Amp3.7@58.288,59.385 IC3_U_Amp3.8@58.288,60.655 58.288,61.038 58.85,61.6 60.5,61.6 ; C11_U_Amp3.1@60.5,60.5 60.5,61.6 ; R2_U_Amp3.2@64.438,60.5 64.438,60.675 63.513,61.6 60.5,61.6
NetC11_U_Amp4_1: C11_U_Amp4.1 IC3_U_Amp4.7 IC3_U_Amp4.8 R2_U_Amp4.2 | length 9.7
  Top Layer w0.4: IC3_U_Amp4.7@58.288,67.385 IC3_U_Amp4.8@58.288,68.655 58.288,69.038 58.85,69.6 60.5,69.6 ; C11_U_Amp4.1@60.5,68.5 60.5,69.6 ; R2_U_Amp4.2@64.438,68.5 64.438,68.675 63.513,69.6 60.5,69.6
NetC11_U_Amp5_1: C11_U_Amp5.1 IC3_U_Amp5.7 IC3_U_Amp5.8 R2_U_Amp5.2 | length 9.7
  Top Layer w0.4: IC3_U_Amp5.7@58.288,75.385 IC3_U_Amp5.8@58.288,76.655 58.288,77.038 58.85,77.6 60.5,77.6 ; C11_U_Amp5.1@60.5,76.5 60.5,77.6 ; R2_U_Amp5.2@64.438,76.5 64.438,76.675 63.513,77.6 60.5,77.6
NetC12_U_Amp1_1: C12_U_Amp1.1 IC3_U_Amp1.4 R3_U_Amp1.2 | length 14.1
  Top Layer w0.4: IC3_U_Amp1.4@52.888,40.845 52.838,40.795 52.838,40.25 53.188,39.9 60.5,39.9 ; C12_U_Amp1.1@60.6,41 60.5,40.9 60.5,39.9 ; R3_U_Amp1.2@64.25,41 64.25,40.484 63.666,39.9 60.5,39.9
NetC12_U_Amp2_1: C12_U_Amp2.1 IC3_U_Amp2.4 R3_U_Amp2.2 | length 14.1
  Top Layer w0.4: IC3_U_Amp2.4@52.888,48.845 52.838,48.795 52.838,48.25 53.188,47.9 60.5,47.9 ; C12_U_Amp2.1@60.6,49 60.5,48.9 60.5,47.9 ; R3_U_Amp2.2@64.25,49 64.25,48.484 63.666,47.9 60.5,47.9
NetC12_U_Amp3_1: C12_U_Amp3.1 IC3_U_Amp3.4 R3_U_Amp3.2 | length 14.1
  Top Layer w0.4: IC3_U_Amp3.4@52.888,56.845 52.838,56.795 52.838,56.25 53.188,55.9 60.5,55.9 ; C12_U_Amp3.1@60.6,57 60.5,56.9 60.5,55.9 ; R3_U_Amp3.2@64.25,57 64.25,56.484 63.666,55.9 60.5,55.9
NetC12_U_Amp4_1: C12_U_Amp4.1 IC3_U_Amp4.4 R3_U_Amp4.2 | length 14.1
  Top Layer w0.4: IC3_U_Amp4.4@52.888,64.845 52.838,64.795 52.838,64.25 53.188,63.9 60.5,63.9 ; C12_U_Amp4.1@60.6,65 60.5,64.9 60.5,63.9 ; R3_U_Amp4.2@64.25,65 64.25,64.484 63.666,63.9 60.5,63.9
NetC12_U_Amp5_1: C12_U_Amp5.1 IC3_U_Amp5.4 R3_U_Amp5.2 | length 14.1
  Top Layer w0.4: IC3_U_Amp5.4@52.888,72.845 52.838,72.795 52.838,72.25 53.188,71.9 60.5,71.9 ; C12_U_Amp5.1@60.6,73 60.5,72.9 60.5,71.9 ; R3_U_Amp5.2@64.25,73 64.25,72.484 63.666,71.9 60.5,71.9
NetC13_U_Amp1_1: C13_U_Amp1.1 IC4_U_Amp1.4 R7_U_Amp1.2 | length 13.3
  Top Layer w0.4: IC4_U_Amp1.4@72.3,40.845 74.655,40.845 75.85,39.65 79.75,39.65 ; C13_U_Amp1.1@79.75,40.75 79.75,39.65 ; R7_U_Amp1.2@83.45,40.75 83.45,40.575 82.525,39.65 79.75,39.65
NetC13_U_Amp2_1: C13_U_Amp2.1 IC4_U_Amp2.4 R7_U_Amp2.2 | length 13.3
  Top Layer w0.4: IC4_U_Amp2.4@72.3,48.845 74.655,48.845 75.85,47.65 79.75,47.65 ; C13_U_Amp2.1@79.75,48.75 79.75,47.65 ; R7_U_Amp2.2@83.45,48.75 83.45,48.575 82.525,47.65 79.75,47.65
NetC13_U_Amp3_1: C13_U_Amp3.1 IC4_U_Amp3.4 R7_U_Amp3.2 | length 13.3
  Top Layer w0.4: IC4_U_Amp3.4@72.3,56.845 74.655,56.845 75.85,55.65 79.75,55.65 ; C13_U_Amp3.1@79.75,56.75 79.75,55.65 ; R7_U_Amp3.2@83.45,56.75 83.45,56.575 82.525,55.65 79.75,55.65
NetC13_U_Amp4_1: C13_U_Amp4.1 IC4_U_Amp4.4 R7_U_Amp4.2 | length 13.3
  Top Layer w0.4: IC4_U_Amp4.4@72.3,64.845 74.655,64.845 75.85,63.65 79.75,63.65 ; C13_U_Amp4.1@79.75,64.75 79.75,63.65 ; R7_U_Amp4.2@83.45,64.75 83.45,64.575 82.525,63.65 79.75,63.65
NetC13_U_Amp5_1: C13_U_Amp5.1 IC4_U_Amp5.4 R7_U_Amp5.2 | length 13.3
  Top Layer w0.4: IC4_U_Amp5.4@72.3,72.845 74.655,72.845 75.85,71.65 79.75,71.65 ; C13_U_Amp5.1@79.75,72.75 79.75,71.65 ; R7_U_Amp5.2@83.45,72.75 83.45,72.575 82.525,71.65 79.75,71.65
NetC14_U_Amp1_1: C14_U_Amp1.1 IC4_U_Amp1.7 R5_U_Amp1.2 | length 2.6
  Top Layer w0.4: IC4_U_Amp1.7@77.7,43.385 78.175,43.385 78.79,44 79.475,44 79.75,44.275 C14_U_Amp1.1@79.75,44.5
NetC14_U_Amp2_1: C14_U_Amp2.1 IC4_U_Amp2.7 R5_U_Amp2.2 | length 2.6
  Top Layer w0.4: IC4_U_Amp2.7@77.7,51.385 78.175,51.385 78.79,52 79.475,52 79.75,52.275 C14_U_Amp2.1@79.75,52.5
NetC14_U_Amp3_1: C14_U_Amp3.1 IC4_U_Amp3.7 R5_U_Amp3.2 | length 2.6
  Top Layer w0.4: IC4_U_Amp3.7@77.7,59.385 78.175,59.385 78.79,60 79.475,60 79.75,60.275 C14_U_Amp3.1@79.75,60.5
NetC14_U_Amp4_1: C14_U_Amp4.1 IC4_U_Amp4.7 R5_U_Amp4.2 | length 2.6
  Top Layer w0.4: IC4_U_Amp4.7@77.7,67.385 78.175,67.385 78.79,68 79.475,68 79.75,68.275 C14_U_Amp4.1@79.75,68.5
NetC14_U_Amp5_1: C14_U_Amp5.1 IC4_U_Amp5.7 R5_U_Amp5.2 | length 2.6
  Top Layer w0.4: IC4_U_Amp5.7@77.7,75.385 78.175,75.385 78.79,76 79.475,76 79.75,76.275 C14_U_Amp5.1@79.75,76.5
NetC15_U_Amp1_1: C15_U_Amp1.1 IC5_U_Amp1.6 R9_U_Amp1.2 | length 11.1
  Top Layer w0.381: IC5_U_Amp1.6@92.389,40.033 92.28,40.143 92.28,40.76 92.753,41.233 96.801,41.233 ; C15_U_Amp1.1@96.874,39.983 96.801,40.057 96.801,41.233 ; R9_U_Amp1.2@100.524,39.983 100.524,40.208 99.499,41.233 96.801,41.233
NetC15_U_Amp2_1: C15_U_Amp2.1 IC5_U_Amp2.6 R9_U_Amp2.2 | length 11.1
  Top Layer w0.381: IC5_U_Amp2.6@92.389,48.033 92.28,48.143 92.28,48.76 92.753,49.233 96.801,49.233 ; C15_U_Amp2.1@96.874,47.983 96.801,48.057 96.801,49.233 ; R9_U_Amp2.2@100.524,47.983 100.524,48.208 99.499,49.233 96.801,49.233
NetC15_U_Amp3_1: C15_U_Amp3.1 IC5_U_Amp3.6 R9_U_Amp3.2 | length 11.1
  Top Layer w0.381: IC5_U_Amp3.6@92.389,56.033 92.28,56.143 92.28,56.76 92.753,57.233 96.801,57.233 ; C15_U_Amp3.1@96.874,55.983 96.801,56.057 96.801,57.233 ; R9_U_Amp3.2@100.524,55.983 100.524,56.208 99.499,57.233 96.801,57.233
NetC15_U_Amp4_1: C15_U_Amp4.1 IC5_U_Amp4.6 R9_U_Amp4.2 | length 11.1
  Top Layer w0.381: IC5_U_Amp4.6@92.389,64.033 92.28,64.143 92.28,64.76 92.753,65.233 96.801,65.233 ; C15_U_Amp4.1@96.874,63.983 96.801,64.057 96.801,65.233 ; R9_U_Amp4.2@100.524,63.983 100.524,64.208 99.499,65.233 96.801,65.233
NetC15_U_Amp5_1: C15_U_Amp5.1 IC5_U_Amp5.6 R9_U_Amp5.2 | length 11.1
  Top Layer w0.381: IC5_U_Amp5.6@92.389,72.033 92.28,72.143 92.28,72.76 92.753,73.233 96.801,73.233 ; C15_U_Amp5.1@96.874,71.983 96.801,72.057 96.801,73.233 ; R9_U_Amp5.2@100.524,71.983 100.524,72.208 99.499,73.233 96.801,73.233
NetC16_U_Amp1_1: C16_U_Amp1.1 IC5_U_Amp1.3 R8_U_Amp1.2 | length 11.1
  Top Layer w0.381: IC5_U_Amp1.3@92.365,45.45 92.256,45.34 92.256,44.723 92.729,44.25 96.777,44.25 ; C16_U_Amp1.1@96.85,45.5 96.777,45.427 96.777,44.25 ; R8_U_Amp1.2@100.5,45.5 100.5,45.275 99.475,44.25 96.777,44.25
NetC16_U_Amp2_1: C16_U_Amp2.1 IC5_U_Amp2.3 R8_U_Amp2.2 | length 11.1
  Top Layer w0.381: IC5_U_Amp2.3@92.365,53.45 92.256,53.34 92.256,52.723 92.729,52.25 96.777,52.25 ; C16_U_Amp2.1@96.85,53.5 96.777,53.427 96.777,52.25 ; R8_U_Amp2.2@100.5,53.5 100.5,53.275 99.475,52.25 96.777,52.25
NetC16_U_Amp3_1: C16_U_Amp3.1 IC5_U_Amp3.3 R8_U_Amp3.2 | length 11.1
  Top Layer w0.381: IC5_U_Amp3.3@92.365,61.45 92.256,61.34 92.256,60.723 92.729,60.25 96.777,60.25 ; C16_U_Amp3.1@96.85,61.5 96.777,61.427 96.777,60.25 ; R8_U_Amp3.2@100.5,61.5 100.5,61.275 99.475,60.25 96.777,60.25
NetC16_U_Amp4_1: C16_U_Amp4.1 IC5_U_Amp4.3 R8_U_Amp4.2 | length 11.1
  Top Layer w0.381: IC5_U_Amp4.3@92.365,69.45 92.256,69.34 92.256,68.723 92.729,68.25 96.777,68.25 ; C16_U_Amp4.1@96.85,69.5 96.777,69.427 96.777,68.25 ; R8_U_Amp4.2@100.5,69.5 100.5,69.275 99.475,68.25 96.777,68.25
NetC16_U_Amp5_1: C16_U_Amp5.1 IC5_U_Amp5.3 R8_U_Amp5.2 | length 11.1
  Top Layer w0.381: IC5_U_Amp5.3@92.365,77.45 92.256,77.34 92.256,76.723 92.729,76.25 96.777,76.25 ; C16_U_Amp5.1@96.85,77.5 96.777,77.427 96.777,76.25 ; R8_U_Amp5.2@100.5,77.5 100.5,77.275 99.475,76.25 96.777,76.25
NetC17_2: C17.2 T1_U_Amp1.4 T1_U_Amp2.4 T1_U_Amp3.4 T1_U_Amp4.4 T1_U_Amp5.4
NetC18_1: C18.1 IC6.7 L1_U_Amp1.1 L1_U_Amp2.1 L1_U_Amp3.1 L1_U_Amp4.1 L1_U_Amp5.1 | length 2.4
  Top Layer w0.381: IC6.7@127.45,42.385 127.517,42.318 129.682,42.318 C18.1@129.75,42.25
NetC19_2: C19.2 IC6.3 R12.2 | length 5.1
  Top Layer w0.381: C19.2@117.5,39.75 R12.2@119.75,39.75 120.034,40.035 120.495,40.035 121.575,41.115 IC6.3@122.05,41.115
NetIC3_U_Amp1_6: IC3_U_Amp1.6 IC4_U_Amp1.3 | length 14.3
  Top Layer w0.4: IC3_U_Amp1.6@58.288,42.115 58.311,42.138 59.388,42.138 59.75,42.5 70.75,42.5 71.135,42.115 IC4_U_Amp1.3@72.3,42.115
NetIC3_U_Amp2_6: IC3_U_Amp2.6 IC4_U_Amp2.3 | length 14.3
  Top Layer w0.4: IC3_U_Amp2.6@58.288,50.115 58.311,50.138 59.388,50.138 59.75,50.5 70.75,50.5 71.135,50.115 IC4_U_Amp2.3@72.3,50.115
NetIC3_U_Amp3_6: IC3_U_Amp3.6 IC4_U_Amp3.3 | length 14.3
  Top Layer w0.4: IC3_U_Amp3.6@58.288,58.115 58.311,58.138 59.388,58.138 59.75,58.5 70.75,58.5 71.135,58.115 IC4_U_Amp3.3@72.3,58.115
NetIC3_U_Amp4_6: IC3_U_Amp4.6 IC4_U_Amp4.3 | length 14.3
  Top Layer w0.4: IC3_U_Amp4.6@58.288,66.115 58.311,66.138 59.388,66.138 59.75,66.5 70.75,66.5 71.135,66.115 IC4_U_Amp4.3@72.3,66.115
NetIC3_U_Amp5_6: IC3_U_Amp5.6 IC4_U_Amp5.3 | length 14.3
  Top Layer w0.4: IC3_U_Amp5.6@58.288,74.115 58.311,74.138 59.388,74.138 59.75,74.5 70.75,74.5 71.135,74.115 IC4_U_Amp5.3@72.3,74.115
NetIC4_U_Amp1_2: IC4_U_Amp1.2 R4_U_Amp1.2 R6_U_Amp1.1 | length 9.8
  Top Layer w0.2: R4_U_Amp1.2@70,41 70.775,41 71.275,41.5 73.184,41.5 73.75,42.066 73.75,42.883 73.248,43.385 IC4_U_Amp1.2@72.3,43.385
  Top Layer w0.4: R6_U_Amp1.1@70,44.5 70.275,44.225 70.275,43.619 70.509,43.385 IC4_U_Amp1.2@72.3,43.385
NetIC4_U_Amp1_6: IC4_U_Amp1.6 IC5_U_Amp1.8 R6_U_Amp1.2 | length 31
  Top Layer w0.4: R6_U_Amp1.2@68,44.5 68,44.725 68.875,45.6 73.15,45.6 76.606,42.144 77.671,42.144 IC4_U_Amp1.6@77.7,42.115 84.385,42.115 v1(84.443,42.058) ; IC5_U_Amp1.8@94.905,40.05 94.955,40 v1(95.5,40)
  Bottom Layer w0.4: v1(84.443,42.058) 86.5,40 v1(95.5,40)
NetIC4_U_Amp2_2: IC4_U_Amp2.2 R4_U_Amp2.2 R6_U_Amp2.1 | length 9.8
  Top Layer w0.2: R4_U_Amp2.2@70,49 70.775,49 71.275,49.5 73.184,49.5 73.75,50.066 73.75,50.883 73.248,51.385 IC4_U_Amp2.2@72.3,51.385
  Top Layer w0.4: R6_U_Amp2.1@70,52.5 70.275,52.225 70.275,51.619 70.509,51.385 IC4_U_Amp2.2@72.3,51.385
NetIC4_U_Amp2_6: IC4_U_Amp2.6 IC5_U_Amp2.8 R6_U_Amp2.2 | length 31
  Top Layer w0.4: R6_U_Amp2.2@68,52.5 68,52.725 68.875,53.6 73.15,53.6 76.606,50.144 77.671,50.144 IC4_U_Amp2.6@77.7,50.115 84.385,50.115 v1(84.443,50.057) ; IC5_U_Amp2.8@94.905,48.05 94.955,48 v1(95.5,48)
  Bottom Layer w0.4: v1(84.443,50.057) 86.5,48 v1(95.5,48)
NetIC4_U_Amp3_2: IC4_U_Amp3.2 R4_U_Amp3.2 R6_U_Amp3.1 | length 9.8
  Top Layer w0.2: R4_U_Amp3.2@70,57 70.775,57 71.275,57.5 73.184,57.5 73.75,58.066 73.75,58.883 73.248,59.385 IC4_U_Amp3.2@72.3,59.385
  Top Layer w0.4: R6_U_Amp3.1@70,60.5 70.275,60.225 70.275,59.619 70.509,59.385 IC4_U_Amp3.2@72.3,59.385
NetIC4_U_Amp3_6: IC4_U_Amp3.6 IC5_U_Amp3.8 R6_U_Amp3.2 | length 31
  Top Layer w0.4: R6_U_Amp3.2@68,60.5 68,60.725 68.875,61.6 73.15,61.6 76.606,58.144 77.671,58.144 IC4_U_Amp3.6@77.7,58.115 84.385,58.115 v1(84.443,58.057) ; IC5_U_Amp3.8@94.905,56.05 94.955,56 v1(95.5,56)
  Bottom Layer w0.4: v1(84.443,58.057) 86.5,56 v1(95.5,56)
NetIC4_U_Amp4_2: IC4_U_Amp4.2 R4_U_Amp4.2 R6_U_Amp4.1 | length 9.8
  Top Layer w0.2: R4_U_Amp4.2@70,65 70.775,65 71.275,65.5 73.184,65.5 73.75,66.066 73.75,66.883 73.248,67.385 IC4_U_Amp4.2@72.3,67.385
  Top Layer w0.4: R6_U_Amp4.1@70,68.5 70.275,68.225 70.275,67.619 70.509,67.385 IC4_U_Amp4.2@72.3,67.385
NetIC4_U_Amp4_6: IC4_U_Amp4.6 IC5_U_Amp4.8 R6_U_Amp4.2 | length 31
  Top Layer w0.4: R6_U_Amp4.2@68,68.5 68,68.725 68.875,69.6 73.15,69.6 76.606,66.144 77.671,66.144 IC4_U_Amp4.6@77.7,66.115 84.385,66.115 v1(84.443,66.057) ; IC5_U_Amp4.8@94.905,64.05 94.955,64 v1(95.5,64)
  Bottom Layer w0.4: v1(84.443,66.057) 86.5,64 v1(95.5,64)
NetIC4_U_Amp5_2: IC4_U_Amp5.2 R4_U_Amp5.2 R6_U_Amp5.1 | length 9.8
  Top Layer w0.2: R4_U_Amp5.2@70,73 70.775,73 71.275,73.5 73.184,73.5 73.75,74.066 73.75,74.883 73.248,75.385 IC4_U_Amp5.2@72.3,75.385
  Top Layer w0.4: R6_U_Amp5.1@70,76.5 70.275,76.225 70.275,75.619 70.509,75.385 IC4_U_Amp5.2@72.3,75.385
NetIC4_U_Amp5_6: IC4_U_Amp5.6 IC5_U_Amp5.8 R6_U_Amp5.2 | length 31
  Top Layer w0.4: R6_U_Amp5.2@68,76.5 68,76.725 68.875,77.6 73.15,77.6 76.606,74.144 77.671,74.144 IC4_U_Amp5.6@77.7,74.115 84.385,74.115 v1(84.443,74.057) ; IC5_U_Amp5.8@94.905,72.05 94.955,72 v1(95.5,72)
  Bottom Layer w0.4: v1(84.443,74.057) 86.5,72 v1(95.5,72)
NetIC5_U_Amp1_1: IC5_U_Amp1.1 IC5_U_Amp2.1 IC5_U_Amp3.1 IC5_U_Amp4.1 IC5_U_Amp5.1 IC6.2 IC6.6 | length 5.9
  Top Layer w0.381: IC6.2@122.05,42.385 124.115,42.385 125.385,41.115 IC6.6@127.45,41.115
NetL2_U_Amp1_1: L2_U_Amp1.1 L2_U_Amp2.1 L2_U_Amp3.1 L2_U_Amp4.1 L2_U_Amp5.1
NetR12_1: R12.1
OUT_HIZ_U_Amp1_N: IC5_U_Amp1.5 R10_U_Amp1.1 | length 2.2
  Top Layer w0.381: R10_U_Amp1.1@89.25,40 91.045,40 IC5_U_Amp1.5@91.095,40.05 IC5_U_Amp1.5@91.095,40.391
OUT_HIZ_U_Amp1_P: IC5_U_Amp1.4 R11_U_Amp1.1 | length 1.9
  Top Layer w0.381: R11_U_Amp1.1@89.25,45.5 89.3,45.45 IC5_U_Amp1.4@91.095,45.45
OUT_HIZ_U_Amp2_N: IC5_U_Amp2.5 R10_U_Amp2.1 | length 2.2
  Top Layer w0.381: R10_U_Amp2.1@89.25,48 91.045,48 IC5_U_Amp2.5@91.095,48.05 IC5_U_Amp2.5@91.095,48.391
OUT_HIZ_U_Amp2_P: IC5_U_Amp2.4 R11_U_Amp2.1 | length 1.9
  Top Layer w0.381: R11_U_Amp2.1@89.25,53.5 89.3,53.45 IC5_U_Amp2.4@91.095,53.45
OUT_HIZ_U_Amp3_N: IC5_U_Amp3.5 R10_U_Amp3.1 | length 2.2
  Top Layer w0.381: R10_U_Amp3.1@89.25,56 91.045,56 IC5_U_Amp3.5@91.095,56.05 IC5_U_Amp3.5@91.095,56.39
OUT_HIZ_U_Amp3_P: IC5_U_Amp3.4 R11_U_Amp3.1 | length 1.9
  Top Layer w0.381: R11_U_Amp3.1@89.25,61.5 89.3,61.45 IC5_U_Amp3.4@91.095,61.45
OUT_HIZ_U_Amp4_N: IC5_U_Amp4.5 R10_U_Amp4.1 | length 2.2
  Top Layer w0.381: R10_U_Amp4.1@89.25,64 91.045,64 IC5_U_Amp4.5@91.095,64.05 IC5_U_Amp4.5@91.095,64.39
OUT_HIZ_U_Amp4_P: IC5_U_Amp4.4 R11_U_Amp4.1 | length 1.9
  Top Layer w0.381: R11_U_Amp4.1@89.25,69.5 89.3,69.45 IC5_U_Amp4.4@91.095,69.45
OUT_HIZ_U_Amp5_N: IC5_U_Amp5.5 R10_U_Amp5.1 | length 2.2
  Top Layer w0.381: R10_U_Amp5.1@89.25,72 91.045,72 IC5_U_Amp5.5@91.095,72.05 IC5_U_Amp5.5@91.095,72.391
OUT_HIZ_U_Amp5_P: IC5_U_Amp5.4 R11_U_Amp5.1 | length 1.9
  Top Layer w0.381: R11_U_Amp5.1@89.25,77.5 89.3,77.45 IC5_U_Amp5.4@91.095,77.45
OUT_U_Amp1_N: J1.19 R10_U_Amp1.2
OUT_U_Amp1_P: J1.14 R11_U_Amp1.2
OUT_U_Amp2_N: J1.12 R10_U_Amp2.2
OUT_U_Amp2_P: J1.10 R11_U_Amp2.2
OUT_U_Amp3_N: J1.9 R10_U_Amp3.2
OUT_U_Amp3_P: J1.7 R11_U_Amp3.2
OUT_U_Amp4_N: J1.6 R10_U_Amp4.2
OUT_U_Amp4_P: J1.4 R11_U_Amp4.2
OUT_U_Amp5_N: J1.3 R10_U_Amp5.2
OUT_U_Amp5_P: J1.1 R11_U_Amp5.2
pads on no net: IC3_U_Amp1.5 IC3_U_Amp1.9 IC3_U_Amp2.5 IC3_U_Amp2.9 IC3_U_Amp3.5 IC3_U_Amp3.9 IC3_U_Amp4.5 IC3_U_Amp4.9 IC3_U_Amp5.5 IC3_U_Amp5.9 IC4_U_Amp1.1 IC4_U_Amp1.5 IC4_U_Amp1.8 IC4_U_Amp2.1 IC4_U_Amp2.5 IC4_U_Amp2.8 IC4_U_Amp3.1 IC4_U_Amp3.5 IC4_U_Amp3.8 IC4_U_Amp4.1 IC4_U_Amp4.5 IC4_U_Amp4.8 IC4_U_Amp5.1 IC4_U_Amp5.5 IC4_U_Amp5.8 IC5_U_Amp1.7 IC5_U_Amp2.7 IC5_U_Amp3.7 IC5_U_Amp4.7 IC5_U_Amp5.7 IC6.1 IC6.5 IC6.8 J1.13 J1.15 J1.16 J1.18 J1.H1 J1.H2

## Text inside footprints (layer, text, board x,y; h text height)
J1: Top Overlay "1" at 138.698,64.75 h1.2 r90; Top Overlay "2" at 139.498,61.65 h1.2 r90; Mechanical 14 "1" at 138.698,64.75 h1.2 r90; Mechanical 14 "2" at 139.498,61.65 h1.2 r90; Mechanical 8 "Interior Side Of Back Panel" at 149.198,58.55 h0.5 r90